# Altium PCB PCB2.PcbDoc
Units mil, origin at the board's own origin, x right, y up, seen from the top; angles counter-clockwise.
Board outline 6000 x 4000 mil, 2 copper layers (Top Layer, Bottom Layer); 7 components, 5 nets, 15 pads, 0 vias.
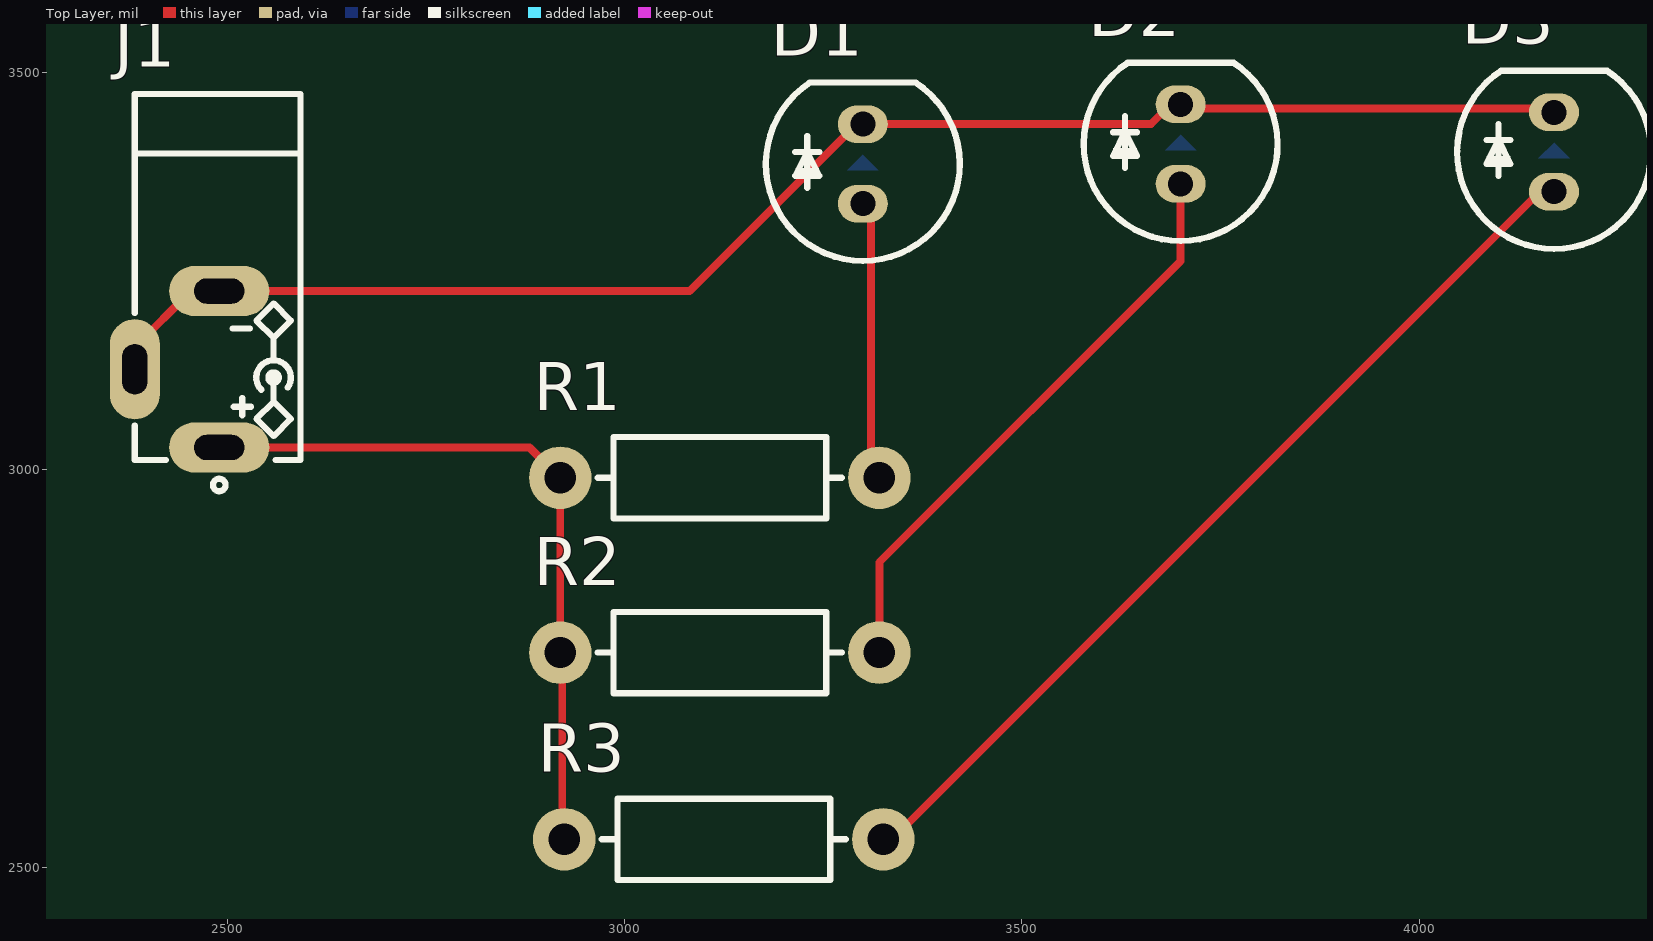
[diagram p0: Top Layer view]
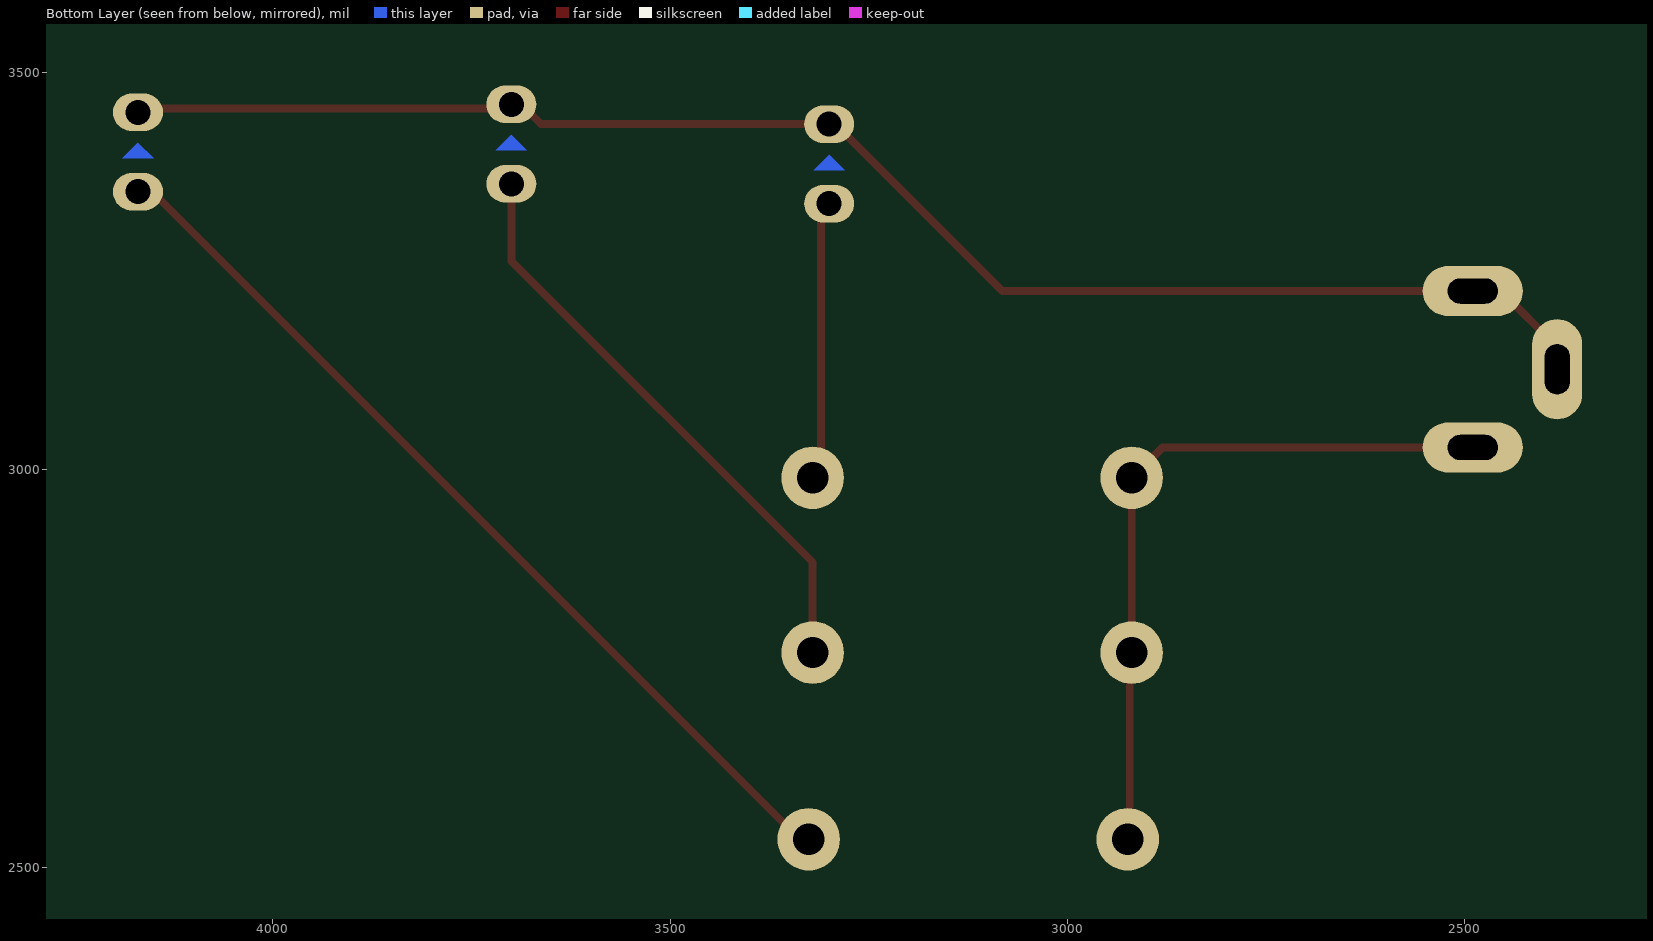
[diagram p1: Bottom Layer view, seen from below]
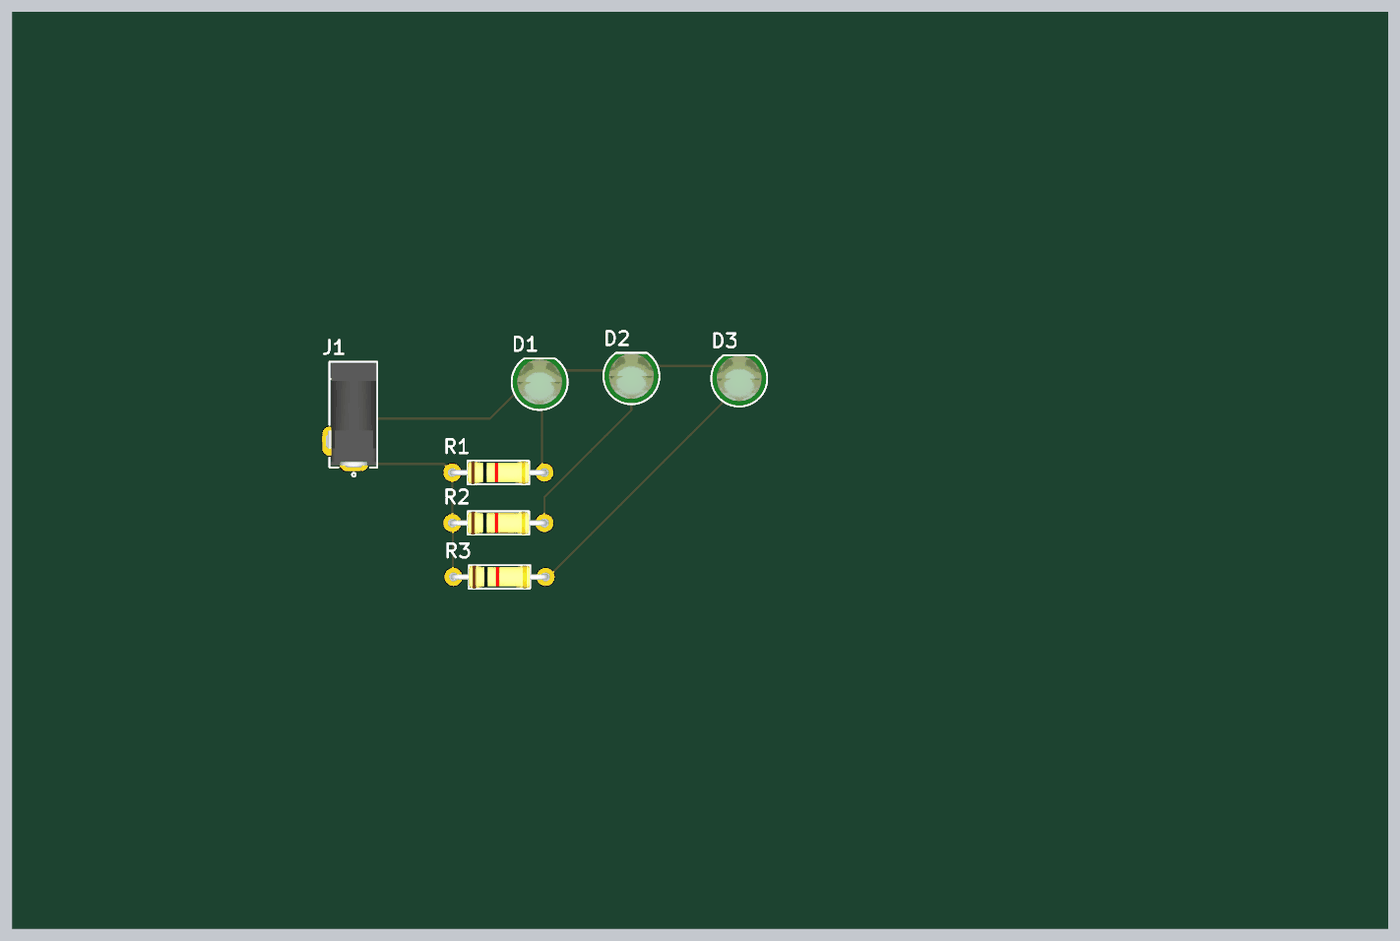
[diagram p2: 3D render of the assembled board from above, using the file's embedded part models]

## Layer stack, top to bottom
Top Solder: solder mask 0.4, Solder Resist, Dk 3.5
Top Layer: signal copper 1.4
Dielectric 1: dielectric 12.6, FR-4, Dk 4.8
Bottom Layer: signal copper 1.4
Bottom Solder: solder mask 0.4, Solder Resist, Dk 3.5

## Board outline
1000,1000 7000,1000 7000,5000 1000,5000

## Design rules (kind name [scope] priority, off if disabled: settings)
Clearance [All] p1: gap=10 ignorepadtopadclearanceinfootprint=FALSE except(0: Arc-Hole Track-Hole SMDPad-Hole THPad-Hole Via-Hole Fill-Hole Poly-Hole Region-Hole Text-Hole)
PolygonConnect [All] p1: connectstyle=Relief reliefconductorwidth=10 reliefentries=4 polygonreliefangle="90 Angle" airgapwidth=10
RoomDefinition Sheet2 [InComponentClass('Sheet2')] p1: confinementstyle=ConfineIn formatcopy=TRUE lockcomponents=FALSE outline 7045,1060 8655,1060 8655,1680 7045,1680
RoutingVias [All] p1: holewidth=28 width=50 viastyle="Through Hole" minholewidth=28 minwidth=50 maxholewidth=28 maxwidth=50
SolderMaskExpansion [All] p1: expansion=4 istentingtop=FALSE
Width [All] p1: maxlimit=10 minlimit=10 preferedwidth=10
30 further rules are at their usual default settings.

## Components (designator, comment, footprint, x,y, rotation, side; value= is the part's Value field where it differs from the comment)
D1 "LED5MM_GRN" LED5MM_GRN 3300,3385 r90 top
D2 "LED5MM_GRN" LED5MM_GRN 3700,3410 r90 top
D3 "LED5MM_GRN" LED5MM_GRN 4170,3400 r90 top
J1 "DC_POWER_JACK" JAC_PWR1 2490,3028.15 r0 top
R1 "10K" R025W_AX04 3120,2990 r0 top
R2 "10K" R025W_AX04 3120,2770 r0 top
R3 "10K" R025W_AX04 3125,2535 r0 top

## Footprints (in the part's own frame and the unit in brackets; to place one, negate y for a bottom-side part, rotate by r counter-clockwise, add the part's x,y. Pads: shape width x height; smd on the part's side, far side on the other; paste and mask are expansions set on the pad)
JAC_PWR1 [mm] "DC POWER JACK, 1mm, Power Jack PJ-031C"
  oval 3.2x1.6 hole 0.8 slot 1.6 at 0 deg: 1(0,0) 2(0,5)
  oval 1.6x3.2 hole 0.8 slot 1.6 at 90 deg: 3(-2.7,2.5)
  silkscreen extent -2.7,-1.4 2.6,11.3, body extent -2.9,-0.4 2.5,11.2, height 7.4
LED5MM_GRN [mm] "LED THD 5MM GREEN"
  oval 1.2x1.6 hole 0.8: 1(-1.27,0) 2(1.27,0)
  Bottom Layer region: -0.2,0.5 -0.2,-0.5 0.3,0
  silkscreen extent -3.1,-3.1 2.6,3.1, body extent -3,-3 2.5,3, height 9.14
R025W_AX04 [mm] "RESISTOR 1/4 WATT, AXIAL0.4"
  round 2 hole 1: 1(-5.1,0) 2(5.1,0)
  silkscreen extent -3.9,-1.3 3.9,1.3, body extent -5.38,-1.28 5.38,1.28, height 2.6

## Part data
D1 D2 D3: library part LED_THD_5MM_GRN, "LED, THD, 5MM, GREEN", ASSEMBLY=ASSEMBLY, DESC=DESCRIPTION, MANF=MANF, MANF_P#=MANF_PART#, PARAM2=2.2V, PRICE=PRICE
J1: library part CONN_PWR_JACKR1, "CONN, PWR JACK DC, PLUG DIAM 1.0MM RA THD", MANF="CUI STACK", MANF_P#="PJ-031CH, PJ-031C", PARAM="CH 3A, C 2A"
R1 R2 R3: library part RES_THD, "RESISTOR, THD", ASSEMBLY=ASSEMBLY, DESC=DESCRIPTION, DIST#=MOUSER, MANF="KOA SPEER", MANF_P#=RK73H1ETTP4701F, PARAM=0.063W, PARAM2=1%, PRICE="100= 0.5$"

## Nets (pads, with @x,y where several pads share a name; then routed paths per layer and width w, separated by ;. In a path a pad name is that pad's centre, name@x,y a point inside that pad or via, vN(x,y) a via of type N, cw(c..) or ccw(c..) an arc to the next point about the centre after c; other vN are vias at no path point)
GND: D1.2 D2.2 D3.2 J1.2 J1.3 | length 1944.7
  Top Layer w10: J1.3 2383.7,3154.13 2454.57,3225 J1.2 3082.13,3225 3292.13,3435 D1.2 3662.51,3435 3687.51,3460 D2.2 3705,3455 4165,3455 D3.2
NetD1_1: D1.1 R1.2 | length 353.6
  Top Layer w10: D1.1 3310.39,3324.61 3310.39,3000.39 R1.2
NetD2_1: D2.1 R2.2 | length 747.1
  Top Layer w10: R2.2 3320.79,2883.59 3700,3262.8 D2.1
NetD3_1: D3.1 R3.2 | length 1181.8
  Top Layer w10: R3.2 3337.05,2535 4152.05,3350 D3.1
VCC: J1.1 R1.1 R2.1 R3.1 | length 902.1
  Top Layer w10: J1.1 2880.47,3028.15 2918.62,2990 R1.1 R2.1 2921.71,2767.5 2921.71,2537.5 R3.1